# Altium PCB board.PcbDoc (part 1 of 2)
Units mm, origin at the board's own origin, x right, y up, seen from the top; angles counter-clockwise.
Board outline 36 x 187 mm, 2 copper layers (Top Layer, Bottom Layer), stack 1.66 mm thick; 133 components, 67 nets, 336 pads, 161 vias.
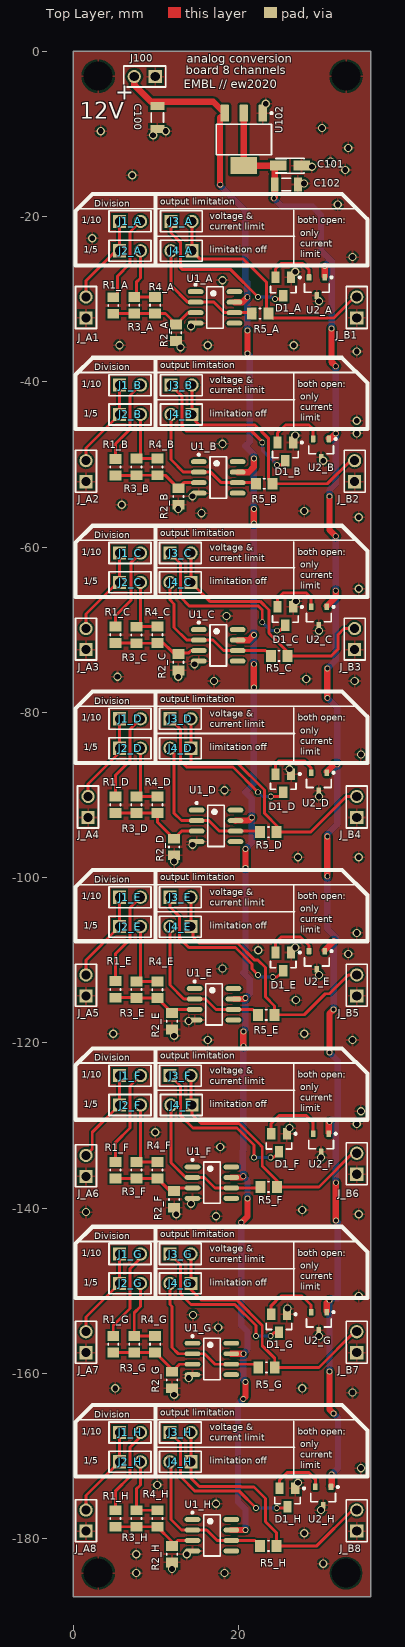
[diagram p0: Top Layer view]
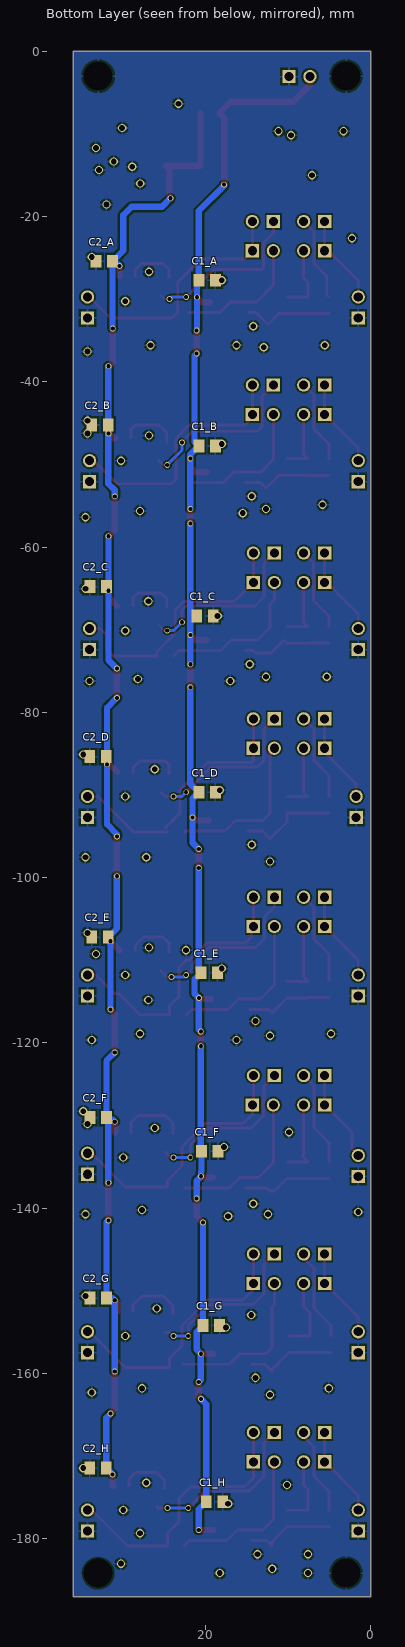
[diagram p1: Bottom Layer view, seen from below]
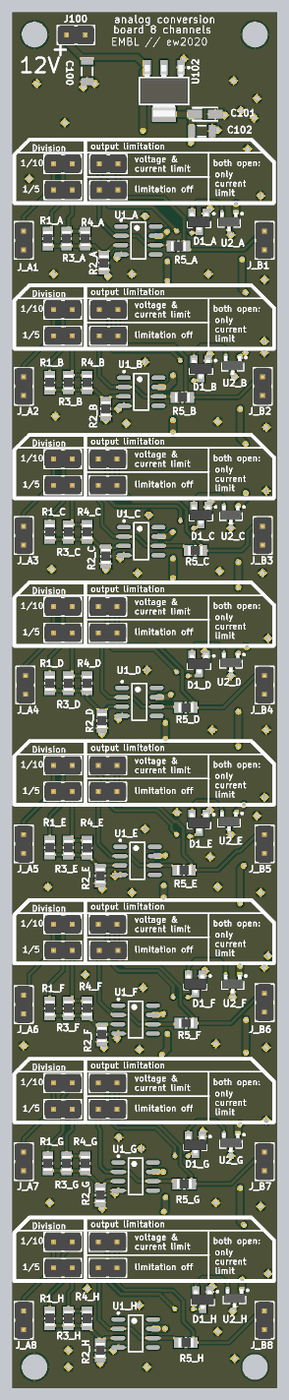
[diagram p2: 3D render of the assembled board from above, using the file's embedded part models]

## Layer stack, top to bottom
Top Solder: solder mask 0.0102, Solder Resist, Dk 3.5
Top Layer: signal copper 0.055
Dielectric1: dielectric 1.55, FR-4, Dk 4.8
Bottom Layer: signal copper 0.055
Bottom Solder: solder mask 0.0102, Solder Resist, Dk 3.5

## Board outline
0,-187 0,0 36,0 36,-187

## Design rules (kind name [scope] priority, off if disabled: settings)
Clearance clearance_polygons [InNamedPolygon('top_gnd_power')or InNamedPolygon('bottom_gnd_power') vs InNamedPolygon('top_gnd_uc')or InNamedPolygon('bottom_gnd_uc')] p1: gap=1.5 ignorepadtopadclearanceinfootprint=FALSE except(0: Arc-Hole Track-Hole SMDPad-Hole THPad-Hole Via-Hole Fill-Hole Poly-Hole Region-Hole Text-Hole)
Clearance ClearanceRoom [WithinRoom('less')  or WithinRoom('less1') or WithinRoom('less2') or WithinRoom('less3') or WithinRoom('less4')] p2: gap=0.203 ignorepadtopadclearanceinfootprint=FALSE except(0: Arc-Hole Track-Hole SMDPad-Hole THPad-Hole Via-Hole Fill-Hole Poly-Hole Region-Hole Text-Hole)
Clearance clearance_HP_class [InNetClass('high_power_net')] p3: gap=0.381 ignorepadtopadclearanceinfootprint=FALSE except(0: Arc-Hole Track-Hole SMDPad-Hole THPad-Hole Via-Hole Fill-Hole Poly-Hole Region-Hole Text-Hole)
Clearance "clearance_24V class" [InNetClass('24V_net')] p4: gap=0.254 ignorepadtopadclearanceinfootprint=FALSE except(0: Arc-Hole Track-Hole SMDPad-Hole THPad-Hole Via-Hole Fill-Hole Poly-Hole Region-Hole Text-Hole)
Clearance Clearance_1 [All] p5: gap=0.203 ignorepadtopadclearanceinfootprint=FALSE except(0: Arc-Hole Track-Hole SMDPad-Hole THPad-Hole Via-Hole Fill-Hole Poly-Hole Region-Hole Text-Hole)
FabricationTestPointUsage TestPointUsage [All] p1: valid=0 allowmultiple=FALSE
FabricationTestpoint Testpoint [All] p1: side=3 testpointundercomponent=TRUE minsize=1.016 maxsize=2.54 preferedsize=1.524 minholesize=0 maxholesize=1.016 preferedholesize=0.813 testpointgrid=0.025 allowsidetop=TRUE allowsidebottom=TRUE usegrid=TRUE gridtolerance=0
HoleSize [All] p1: absolutevalues=TRUE maxlimit=6 minlimit=0.025 maxpercent=80.000 minpercent=20.000
PolygonConnect PolygonConnect_Power [(InNet('+5V') OR InNet('-24VBUS'))] p1: connectstyle=Relief reliefconductorwidth=2.54 reliefentries=4 polygonreliefangle="90 Angle" airgapwidth=0.254
PolygonConnect [All] p2: connectstyle=Relief reliefconductorwidth=0.254 reliefentries=4 polygonreliefangle="90 Angle" airgapwidth=0.254
RoutingVias [All] p1: holewidth=0.5 width=0.7 viastyle="Through Hole" minholewidth=0.3 minwidth=0.5 maxholewidth=0.711 maxwidth=1.27
SilkToSolderMaskClearance SilkscreenOverComponentPads [IsPad] p1: minsilkscreentomaskgap=0.254 clearancetoexposedcopper=TRUE
SolderMaskExpansion [All] p1: expansion=0.102 istentingtop=FALSE
Width WidthRoom [WithinRoom('less')  or WithinRoom('less1') or WithinRoom('less2') or WithinRoom('less3') or WithinRoom('less4')] p1: maxlimit=0.356 minlimit=0.356 preferedwidth=0.356
Width Width_HC_class [InNetClass('High_Current_net')] p2: maxlimit=15.24 minlimit=1.524 preferedwidth=1.524
Width Width_HP_class [InNetClass('High_Power_net')] p3: maxlimit=1.016 minlimit=1.016 preferedwidth=1.016
Width "Width_24V class" [InNetClass('24V_net')] p4: maxlimit=0.762 minlimit=0.762 preferedwidth=0.762
Width Width_1 [All] p5: maxlimit=0.356 minlimit=0.356 preferedwidth=0.356
26 further rules are at their usual default settings.

## Classes and differential pairs
channel class Sheet1: A B C D
component class D: C1_D C2_D D1_D J1_D J2_D J3_D J4_D R1_D R2_D R3_D R4_D R5_D U1_D U2_D
component class C: C1_C C2_C D1_C J1_C J2_C J3_C J4_C R1_C R2_C R3_C R4_C R5_C U1_C U2_C
component class B: C1_B C2_B D1_B J1_B J2_B J3_B J4_B R1_B R2_B R3_B R4_B R5_B U1_B U2_B
component class A: C1_A C2_A D1_A J1_A J2_A J3_A J4_A R1_A R2_A R3_A R4_A R5_A U1_A U2 U2_A
net class 24V_net: +5V +12V
component class sheetPower: C100 C101 C102 J100 U102
component class sheet_top: J_A1 J_A2 J_A3 J_A4 J_A5 J_A6 J_A7 J_A8 J_B1 J_B2 J_B3 J_B4 J_B5 J_B6 J_B7 J_B8
component class E: C1_E C2_E D1_E J1_E J2_E J3_E J4_E R1_E R2_E R3_E R4_E R5_E U1_E U2_E
component class F: C1_F C2_F D1_F J1_F J2_F J3_F J4_F R1_F R2_F R3_F R4_F R5_F U1_F U2_F
component class G: C1_G C2_G D1_G J1_G J2_G J3_G J4_G R1_G R2_G R3_G R4_G R5_G U1_G U2_G
component class H: C1_H C2_H D1_H J1_H J2_H J3_H J4_H R1_H R2_H R3_H R4_H R5_H U1_H U2_H

## Components (designator, comment, footprint, x,y, rotation, side; value= is the part's Value field where it differs from the comment)
C1_A "100nF" CAPC2013X88X50ML20T25 19.812,-27.686 r0 bottom (schematic designator C1)
C1_B "100nF" CAPC2013X88X50ML20T25 19.812,-47.752 r0 bottom (schematic designator C1)
C1_C "100nF" CAPC2013X88X50ML20T25 20.066,-68.326 r0 bottom (schematic designator C1)
C1_D "100nF" CAPC2013X88X50ML20T25 19.812,-89.662 r0 bottom (schematic designator C1)
C1_E "100nF" CAPC2013X88X50ML20T25 19.558,-111.506 r0 bottom (schematic designator C1)
C1_F "100nF" CAPC2013X88X50ML20T25 19.495,-133.096 r0 bottom (schematic designator C1)
C1_G "100nF" CAPC2013X88X50ML20T25 19.304,-154.178 r0 bottom (schematic designator C1)
C1_H "100nF" CAPC2013X88X50ML20T25 18.923,-175.514 r0 bottom (schematic designator C1)
C2_A "100nF" CAPC2013X88X50ML20T25 32.258,-25.4 r0 bottom (schematic designator C2)
C2_B "100nF" CAPC2013X88X50ML20T25 32.766,-45.212 r0 bottom (schematic designator C2)
C2_C "100nF" CAPC2013X88X50ML20T25 33,-64.77 r0 bottom (schematic designator C2)
C2_D "100nF" CAPC2013X88X50ML20T25 33.02,-85.344 r0 bottom (schematic designator C2)
C2_E "100nF" CAPC2013X88X50ML20T25 32.766,-107.188 r0 bottom (schematic designator C2)
C2_F "100nF" CAPC2013X88X50ML20T25 33,-129.032 r0 bottom (schematic designator C2)
C2_G "100nF" CAPC2013X88X50ML20T25 33,-150.876 r0 bottom (schematic designator C2)
C2_H "100nF" CAPC2013X88X50ML20T25 33.02,-171.45 r0 bottom (schematic designator C2)
C100 "100uF" CAPC1206(3216)190_L 10.16,-8.004 r90 top
C101 "4,7 µF" "A Package" 24.809,-13.828 r0 top
C102 "100uF" CAPC1206(3216)190_L 25.77,-16.114 r180 top
D1_A "BAT54S" FAIR-SOT23-3_V 25.4,-28.448 r270 top (schematic designator D1)
D1_B "BAT54S" FAIR-SOT23-3_V 25.654,-48.43 r270 top (schematic designator D1)
D1_C "BAT54S" FAIR-SOT23-3_V 25.654,-68.326 r270 top (schematic designator D1)
D1_D "BAT54S" FAIR-SOT23-3_V 25.4,-88.562 r270 top (schematic designator D1)
D1_E "BAT54S" FAIR-SOT23-3_V 25.4,-110.152 r270 top (schematic designator D1)
D1_F "BAT54S" FAIR-SOT23-3_V 24.892,-132.08 r270 top (schematic designator D1)
D1_G "BAT54S" FAIR-SOT23-3_V 24.892,-153.924 r270 top (schematic designator D1)
D1_H "BAT54S" FAIR-SOT23-3_V 25.908,-175.006 r270 top (schematic designator D1)
J1_A "61300211121" 61300211121 5.588,-20.574 r0 top (schematic designator J1)
J1_B "61300211121" 61300211121 5.588,-40.386 r0 top (schematic designator J1)
J1_C "61300211121" 61300211121 5.588,-60.706 r0 top (schematic designator J1)
J1_D "61300211121" 61300211121 5.588,-80.772 r0 top (schematic designator J1)
J1_E "61300211121" 61300211121 5.588,-102.362 r0 top (schematic designator J1)
J1_F "61300211121" 61300211121 5.588,-123.952 r0 top (schematic designator J1)
J1_G "61300211121" 61300211121 5.588,-145.542 r0 top (schematic designator J1)
J1_H "61300211121" 61300211121 5.588,-167.132 r0 top (schematic designator J1)
J2_A "61300211121" 61300211121 5.588,-24.13 r0 top (schematic designator J2)
J2_B "61300211121" 61300211121 5.588,-43.942 r0 top (schematic designator J2)
J2_C "61300211121" 61300211121 5.588,-64.262 r0 top (schematic designator J2)
J2_D "61300211121" 61300211121 5.588,-84.328 r0 top (schematic designator J2)
J2_E "61300211121" 61300211121 5.588,-105.918 r0 top (schematic designator J2)
J2_F "61300211121" 61300211121 5.588,-127.508 r0 top (schematic designator J2)
J2_G "61300211121" 61300211121 5.588,-149.098 r0 top (schematic designator J2)
J2_H "61300211121" 61300211121 5.588,-170.691 r0 top (schematic designator J2)
J3_A "61300211121" 61300211121 11.805,-20.574 r0 top (schematic designator J3)
J3_B "61300211121" 61300211121 11.805,-40.386 r0 top (schematic designator J3)
J3_C "61300211121" 61300211121 11.684,-60.706 r0 top (schematic designator J3)
J3_D "61300211121" 61300211121 11.684,-80.772 r0 top (schematic designator J3)
J3_E "61300211121" 61300211121 11.684,-102.362 r0 top (schematic designator J3)
J3_F "61300211121" 61300211121 11.684,-123.952 r0 top (schematic designator J3)
J3_G "61300211121" 61300211121 11.684,-145.542 r0 top (schematic designator J3)
J3_H "61300211121" 61300211121 11.684,-167.132 r0 top (schematic designator J3)
J4_A "61300211121" 61300211121 14.345,-24.13 r180 top (schematic designator J4)
J4_B "61300211121" 61300211121 14.345,-43.942 r180 top (schematic designator J4)
J4_C "61300211121" 61300211121 14.224,-64.262 r180 top (schematic designator J4)
J4_D "61300211121" 61300211121 14.224,-84.328 r180 top (schematic designator J4)
J4_E "61300211121" 61300211121 14.224,-105.918 r180 top (schematic designator J4)
J4_F "61300211121" 61300211121 14.345,-127.508 r180 top (schematic designator J4)
J4_G "61300211121" 61300211121 14.224,-149.098 r180 top (schematic designator J4)
J4_H "61300211121" 61300211121 14.224,-170.691 r180 top (schematic designator J4)
J100 "61300211121" 61300211121 9.906,-3.048 r180 top
J_A1 "61300211121" 61300211121 1.524,-32.258 r90 top
J_A2 "61300211121" 61300211121 1.524,-52.07 r90 top
J_A3 "61300211121" 61300211121 1.524,-72.39 r90 top
J_A4 "61300211121" 61300211121 1.778,-92.71 r90 top
J_A5 "61300211121" 61300211121 1.524,-114.3 r90 top
J_A6 "61300211121" 61300211121 1.524,-136.144 r90 top
J_A7 "61300211121" 61300211121 1.524,-157.48 r90 top
J_A8 "61300211121" 61300211121 1.524,-179.07 r90 top
J_B1 "61300211121" 61300211121 34.29,-32.258 r90 top
J_B2 "61300211121" 61300211121 34.036,-52.07 r90 top
J_B3 "61300211121" 61300211121 34.036,-72.39 r90 top
J_B4 "61300211121" 61300211121 34.29,-92.71 r90 top
J_B5 "61300211121" 61300211121 34.29,-114.3 r90 top
J_B6 "61300211121" 61300211121 34.29,-135.89 r90 top
J_B7 "61300211121" 61300211121 34.29,-157.48 r90 top
J_B8 "61300211121" 61300211121 34.29,-179.07 r90 top
R1_A "9k (18k||18k)" YAGO-RC0805_M 4.826,-30.75 r90 top (schematic designator R1)
R1_B "9k (18k||18k)" YAGO-RC0805_M 5.08,-50.308 r90 top (schematic designator R1)
R1_C "9k (18k||18k)" YAGO-RC0805_M 5.08,-70.612 r90 top (schematic designator R1)
R1_D "9k (18k||18k)" YAGO-RC0805_M 5.08,-91.186 r90 top (schematic designator R1)
R1_E "9k (18k||18k)" YAGO-RC0805_M 5.08,-113.522 r90 top (schematic designator R1)
R1_F "9k (18k||18k)" YAGO-RC0805_M 5.08,-135.382 r90 top (schematic designator R1)
R1_G "9k (18k||18k)" YAGO-RC0805_M 4.826,-156.464 r90 top (schematic designator R1)
R1_H "9k (18k||18k)" YAGO-RC0805_M 5.08,-177.546 r90 top (schematic designator R1)
R2_A "1k" YAGO-RC0805_M 12.446,-34.036 r90 top (schematic designator R2)
R2_B "1k" YAGO-RC0805_M 12.7,-53.864 r90 top (schematic designator R2)
R2_C "1k" YAGO-RC0805_M 12.7,-73.914 r90 top (schematic designator R2)
R2_D "1k" YAGO-RC0805_M 12.192,-96.282 r90 top (schematic designator R2)
R2_E "1k" YAGO-RC0805_M 11.938,-117.364 r90 top (schematic designator R2)
R2_F "1k" YAGO-RC0805_M 12.192,-138.938 r90 top (schematic designator R2)
R2_G "1k" YAGO-RC0805_M 11.938,-160.782 r90 top (schematic designator R2)
R2_H "1k" YAGO-RC0805_M 11.938,-181.864 r90 top (schematic designator R2)
R3_A "4k7" YAGO-RC0805_M 7.366,-30.734 r90 top (schematic designator R3)
R3_B "4k7" YAGO-RC0805_M 7.62,-50.292 r90 top (schematic designator R3)
R3_C "4k7" YAGO-RC0805_M 7.62,-70.628 r90 top (schematic designator R3)
R3_D "4k7" YAGO-RC0805_M 7.62,-91.186 r90 top (schematic designator R3)
R3_E "4k7" YAGO-RC0805_M 7.62,-113.538 r90 top (schematic designator R3)
R3_F "4k7" YAGO-RC0805_M 7.62,-135.382 r90 top (schematic designator R3)
R3_G "4k7" YAGO-RC0805_M 7.366,-156.464 r90 top (schematic designator R3)
R3_H "4k7" YAGO-RC0805_M 7.62,-177.546 r90 top (schematic designator R3)
R4_A "27k" YAGO-RC0805_M 9.906,-30.734 r90 top (schematic designator R4)
R4_B "27k" YAGO-RC0805_M 10.16,-50.292 r90 top (schematic designator R4)
R4_C "27k" YAGO-RC0805_M 10.16,-70.612 r90 top (schematic designator R4)
R4_D "27k" YAGO-RC0805_M 10.16,-91.186 r90 top (schematic designator R4)
R4_E "27k" YAGO-RC0805_M 10.16,-113.554 r90 top (schematic designator R4)
R4_F "27k" YAGO-RC0805_M 10.16,-135.382 r90 top (schematic designator R4)
R4_G "27k" YAGO-RC0805_M 9.906,-156.464 r90 top (schematic designator R4)
R4_H "27k" YAGO-RC0805_M 10.16,-177.546 r90 top (schematic designator R4)
R5_A "220" YAGO-RC0805_M 22.59,-31.75 r180 top (schematic designator R5)
R5_B "220" YAGO-RC0805_M 23.114,-52.324 r180 top (schematic designator R5)
R5_C "220" YAGO-RC0805_M 24.892,-73.152 r180 top (schematic designator R5)
R5_D "220" YAGO-RC0805_M 23.606,-94.488 r180 top (schematic designator R5)
R5_E "220" YAGO-RC0805_M 23.352,-116.586 r180 top (schematic designator R5)
R5_F "220" YAGO-RC0805_M 23.622,-137.414 r180 top (schematic designator R5)
R5_G "220" YAGO-RC0805_M 23.368,-159.258 r180 top (schematic designator R5)
R5_H "220" YAGO-RC0805_M 23.606,-180.848 r180 top (schematic designator R5)
U1_A "AD8029ARZ" ADI-R-8_L 17.145,-30.988 r0 top (schematic designator U1)
U1_B "AD8029ARZ" ADI-R-8_L 17.526,-51.562 r0 top (schematic designator U1)
U1_C "AD8029ARZ" ADI-R-8_L 17.526,-71.882 r0 top (schematic designator U1)
U1_D "AD8029ARZ" ADI-R-8_L 17.272,-93.726 r0 top (schematic designator U1)
U1_E "AD8029ARZ" ADI-R-8_L 17.018,-115.316 r0 top (schematic designator U1)
U1_F "AD8029ARZ" ADI-R-8_L 16.764,-136.906 r0 top (schematic designator U1)
U1_G "AD8029ARZ" ADI-R-8_L 16.764,-158.242 r0 top (schematic designator U1)
U1_H "AD8029ARZ" ADI-R-8_L 16.764,-179.578 r0 top (schematic designator U1)
U2_A "REF3112AIDBZT" DBZ0003A_L 29.464,-28.448 r270 top (schematic designator U2)
U2_B "REF3112AIDBZT" DBZ0003A_L 29.972,-48.006 r270 top (schematic designator U2)
U2_C "REF3112AIDBZT" DBZ0003A_L 29.718,-68.326 r270 top (schematic designator U2)
U2_D "REF3112AIDBZT" DBZ0003A_L 29.718,-88.392 r270 top (schematic designator U2)
U2_E "REF3112AIDBZT" DBZ0003A_L 29.464,-109.982 r270 top (schematic designator U2)
U2_F "REF3112AIDBZT" DBZ0003A_L 29.972,-132.08 r270 top (schematic designator U2)
U2_G "REF3112AIDBZT" DBZ0003A_L 29.718,-153.67 r270 top (schematic designator U2)
U2_H "REF3112AIDBZT" DBZ0003A_L 30.226,-174.822 r270 top (schematic designator U2)
U102 "LM1117IMP-5.0/NOPB" DCY0004A_M 20.624,-10.653 r270 top

## Footprints (in the part's own frame and the unit in brackets; to place one, negate y for a bottom-side part, rotate by r counter-clockwise, add the part's x,y. Pads: shape width x height; smd on the part's side, far side on the other; paste and mask are expansions set on the pad)
61300211121 [mm] "2Pol; gerade; WR-PHD 2.54 mm THT Pin Header"
  rect 1.6x1.6 hole 1.1: 1(0,0)
  round 1.6 hole 1.1: 2(2.54,0)
  silkscreen extent -1.27,-1.27 3.81,1.27, body extent -1.27,-1.27 3.81,1.27, height 8.57
"A Package" [mm] "A Package; Low Density"
  rect 2x1.2 smd: 1(0,0) 2(2.8,0)
  silkscreen extent -0.3,-0.9 3.1,0.9
ADI-R-8_L [mm] "SOIC, 8-Leads, Body 4.9x3.9mm, Pitch 1.27mm, IPC High Density"
  oval 1.9x0.6 smd: 1(-2.35,1.905) 2(-2.35,0.635) 3(-2.35,-0.635) 4(-2.35,-1.905) 5(2.35,-1.905) 6(2.35,-0.635) 7(2.35,0.635) 8(2.35,1.905)
  silkscreen extent -2.47,-2.5 1,2.88, body extent -2,-2.5 2,2.5, height 1.75
CAPC1206(3216)190_L [mm] "Chip Capacitor, Body 3.2x1.6mm, Height 1.9mm, IPC High Density"
  rect 0.95x1.7 smd: 1(-1.4,0) 2(1.4,0)
  silkscreen extent -0.55,-0.75 0.55,0.75, body extent -1.7,-0.9 1.7,0.9, height 1.9
CAPC2013X88X50ML20T25 [mm] "Chip Capacitor, 2-Leads, Body 2.00x1.25mm, IPC Low Density"
  rect 1.3x1.55 smd: 1(-1,0) 2(1,0)
  body extent -1.1,-0.72 1.1,0.72, height 0.88
DBZ0003A_L [mm] "SOT23, 3-Leads, Body 3.04x1.4mm, Pitch 0.95mm, IPC High Density"
  rrect18% 0.8x0.55 smd: 1(-1.1,0.95) 2(-1.1,-0.95) 3(1.1,0)
  silkscreen extent -1.22,-1.5 0.7,1.9, body extent -1.26,-1.46 1.26,1.46, height 0.96
DCY0004A_M [mm] "SOT223, 4-Leads, Body 6.7x3.7mm, Pitch 2.3mm, IPC Low Density"
  rrect10% 2.05x1 smd: 1(-3.175,2.3) 2(-3.175,0) 3(-3.175,-2.3)
  rrect5% 2.05x3.25 smd: 4(3.175,0)
  silkscreen extent -3.3,-3.35 1.85,3.48, body extent -3.5,-3.25 3.5,3.25, height 1.62
FAIR-SOT23-3_V [mm] "SOT23, 3-Leads, Body 3.12x1.5mm, Pitch 0.95mm"
  rect 1.4x1 smd: 1(-1.1,0.95) 2(-1.1,-0.95) 3(1.1,0)
  silkscreen extent -1.22,-1.55 0.75,2.13, body extent -1.35,-1.56 1.35,1.56, height 1.2
YAGO-RC0805_M [mm] "Chip Resistor, 2-Leads, Body 2.00x1.25mm, IPC Low Density"
  rect 1.2x1.45 smd: 1(-1,0) 2(1,0)
  silkscreen extent -0.1,-0.63 0.1,0.63, body extent -1,-0.62 1,0.63, height 0.6

## Part data
C1_A C1_B C1_C C1_D C1_E C1_F C1_G C1_H C2_A C2_B C2_C C2_D C2_E C2_F C2_G C2_H: library part CMP-001-0082-2, "generic 0805 COG oder X7R Vielschichtkondensatoren max. +/-10%"
C100 C102: library part CMP-00469-2, "CAP 100uF 6.3V ±20% 1206 (3216 Metric) Thickness 1.9mm SMD", Case-EIA=1206, Case-Metric=3216, Manufacturer="WURTH ELEKTRONIK", Manufacturer Part Number=885012108005, Rated Voltage="6.3 V", Supplier Part Number=2495155, Tolerance=Â±20%, ComponentLink1Description=2326302.pdf, ComponentLink1URL=http://www.farnell.com/cad/2326302.pdf, ComponentLink2Description=1958456.pdf, ComponentLink2URL=http://www.farnell.com/datasheets/1958456.pdf, Max Thickness="1.9 mm", PartNumber=885012108005, Supplier=Farnell, Technology=SMT
C101: library part CMP-001-0039-3, "4,7 µF; 6V; Gr. A; T491A475K006AT", Capacitance=4.7µF, ESR (Equivalent Series Resistance)="6 Ohm", Lifetime @ Temp.="2000 Hrs @ 85°C", Manufacturer=KEMET, Manufacturer Size Code=A, Operating Temperature="-55°C ~ 125°C", Package / Case="1206 (3216 Metric)", PartNumber=T491A475K006AT, Supplier Part Number=399-9717-1-ND, Tolerance=±10%, Voltage - Rated=6.3V, ComponentLink1Description=KEM_T2005_T491.pdf, ComponentLink1URL=http://www.kemet.com/Lists/ProductCatalog/Attachments/254/KEM_T2005_T491.pdf, Failure Rate=-, Features="General Purpose", Height - Seated (Max)="0.071\" (1.80mm)", Lead Spacing=-, Mounting Type="Surface Mount", Packaging="Cut Tape (CT)", Part Status=Active, Size / Dimension="0.126\" L x 0.063\" W (3.20mm x 1.60mm)", Supplier=Digi-Key, Type=Molded
D1_A D1_B D1_C D1_D D1_E D1_F D1_G D1_H: library part CMP-00532-3, "Schottky Barrier Diode, 30 V, 0.2 A, -55 to 150 degC, 3-Pin SOT23, RoHS, Tape and Reel", Capacitance="1.8E-11 f", Frequency="16 MHz", Frequency Tolerance=30ppm, Load Capacitance="18 pF", Manufacturer="DIODES INC.", Max Operating Temperature=70degC, Min Operating Temperature=-10degC, Package Quantity=1000, Resistance="40 Ohm", ComponentLink1Description="Manufacturer URL", ComponentLink1URL=https://www.fairchildsemi.com/, ComponentLink2Description=Datasheet, ComponentLink2URL=https://www.fairchildsemi.com/datasheets/BA/BAT54S.pdf, ComponentLink3Description="Package Specification", ComponentLink3URL=http://www.fairchildsemi.com/dwg/MA/MA03D.pdf, DatasheetVersion="Rev. 2.3, 04/2016", ESR="40 Ohm", Height="0.9 mm", Length="5 mm", Mount="Surface Mount", PackageDescription="3-Pin Small Outline Transistor, Body 2.92 x 1.325 mm, Pitch 0.95 mm", PackageReference=SOT23-3, Packaging="Tape and Reel", PartNumber=BAT54S, Pins=4, REACH SVHC="No SVHC", RoHSCompliant=True, Tolerance=30ppm, Width="3.2 mm"
J1_A J1_B J1_C J1_D J1_E J1_F J1_G J1_H J2_A J2_B J2_C J2_D J2_E J2_F J2_G J2_H J3_A J3_B J3_C J3_D J3_E J3_F J3_G J3_H J4_A J4_B J4_C J4_D J4_E J4_F J4_G J4_H J100 J_A1 J_A2 J_A3 J_A4 J_A5 J_A6 J_A7 J_A8 J_B1 J_B2 J_B3 J_B4 J_B5 J_B6 J_B7 J_B8: library part CMP-001-0071-1, "2Pol; gerade; WR-PHD 2.54 mm THT Pin Header", Current Rating="3 A", Flammability Rating="UL 94 V-0", Insulation Resistance="1 GOhms", Manufacturer="Wurth Electronics", Supplier Part Number=710-61300211121, Voltage Rating="250 V", Accessory Type=-, Application="Wire to Board", Brand="Wurth Electronics", ComponentLink1Description=6130xx11121-538006.pdf, ComponentLink1URL=http://www.mouser.com/ds/2/445/6130xx11121-538006.pdf, Contact Gender="Pin (Male)", Contact Material="Copper Alloy", Contact Plating=Gold, Contact Type=-, Housing Gender=-, Housing Material="Polybutylene Terephthalate (PBT)", Latching Type=Unlatched, Manufacturer Part Number=61300211121, Mating Post Length="6 mm", Minimum Order Quantity=1, Mounting Angle=Straight, Mounting Style="Straight Pin", Number of Positions="2 Position", Number of Rows="1 Row", Packaging=Bulk, PartNumber=61300211121, Pitch="2.54 mm", Product=Headers, Reeling=False, RoHS - Mouser=Y, Row Spacing=-, Series=WR-PHD, Standard Pack Qty=1000, Supplier=Mouser, Termination Post Length="3 mm", Termination Style="Through Hole", Type="Pin Strip"
R1_A R1_B R1_C R1_D R1_E R1_F R1_G R1_H R2_A R2_B R2_C R2_D R2_E R2_F R2_G R2_H R3_A R3_B R3_C R3_D R3_E R3_F R3_G R3_H R4_A R4_B R4_C R4_D R4_E R4_F R4_G R4_H R5_A R5_B R5_C R5_D R5_E R5_F R5_G R5_H: library part CMP-001-0027-2, "0805 Yageo Standard BlackBox Resistors", Manufacturer=Yageo, Operating Temperature="-55°C ~ 155°C", Package / Case="0805 (2012 Metric)", Power (Watts)="0.125W, 1/8W", Supplier Device Package=0805, Temperature Coefficient=±200ppm/°C, Tolerance=±1%, ComponentLink1Description=PYu-RC_Group_51_RoHS_L_7.pdf, ComponentLink1URL=http://www.yageo.com/documents/recent/PYu-RC_Group_51_RoHS_L_7.pdf, Composition="Thick Film", Failure Rate=-, Features="Moisture Resistant", Height - Seated (Max)="0.024\" (0.60mm)", Packaging=Digi-Reel®, Part Status=Active, Size / Dimension="0.079\" L x 0.049\" W (2.00mm x 1.25mm)"
U1_A U1_B U1_C U1_D U1_E U1_F U1_G U1_H: library part CMP-00480-1, "Single Channel RRIO Operational Amplifier, 125 MHz BW, 62 V/us SR, Industrial, 8-pin SOIC (R-8), Tube", Amplifiers Per Package=1, Generic Part Number=AD8029, Input Bias Current=700nA, Input Offset Voltage=1.6mV, Manufacturer="Analog Devices", Code_JEDEC=MS-012-AA, ComponentLink1Description="Manufacturer URL", ComponentLink1URL=http://www.analog.com/en/index.html, ComponentLink2Description=Datasheet, ComponentLink2URL=http://www.analog.com/static/imported-files/data_sheets/AD8029_8030_8040.pdf, ComponentLink3Description="Package Specification", ComponentLink3URL=http://www.analog.com/static/imported-files/packages/PKG_PDF/SOIC_Narrow%20(R)/R_8.pdf, DatasheetVersion="Rev. B", Iq/Amp=1.5mA, Mounting Technology="Surface Mount", PackageDescription="8-Pin Standard Small Outline Package, Body 3.9 x 4.9 mm, Pitch 1.27 mm", PackageReference=R-8, PackageVersion=060506-A, PartNumber=AD8029ARZ, Slew Rate=62V/us, Small Signal Bandwidth=125MHz, V Span Max=12V, V Span Min=2.7V
U2_A U2_B U2_C U2_D U2_E U2_F U2_G U2_H: library part CMP-00534-1, "20 ppm / degC Max, 100 uA Series Voltage Reference, 3-pin SOT-23 (DBZ), Green (RoHS & no Sb/Br)", Manufacturer="Texas Instruments", Rating=Catalog, Temp Coeff(Max)(ppm/ degree C)=20, Temp Coeff(Typ)(ppm/ degree C)=10, Code_JEDEC=TO-236, ComponentLink1Description="Manufacturer URL", ComponentLink1URL=http://www.ti.com/, ComponentLink2Description=Datasheet, ComponentLink2URL=http://www.ti.com/general/docs/lit/getliterature.tsp?genericPartNumber=REF3112&fileType=pdf, ComponentLink3Description="Package Specification", ComponentLink3URL=http://www.ti.com/litv/pdf/mpds108a, DatasheetVersion=SBVS046C, Eco-Plan="Green (RoHS & no Sb/Br)", Initial Accuracy @ 25/deg C(%)=0.2, Iq(Max)(uA)=100, Mounting Technology="Surface Mount", PackageDescription="3-Pin Plastic Small Outline, Body 2.92 x 1.3 mm, Pitch 0.95 mm", PackageReference=DBZ0003A, PackageVersion=4203227/B, PartNumber=REF3112AIDBZT, SubFamily="Series Voltage Reference", VI(Max)(V)=5.5, VI(Min)(V)=1.8, VO(V)=1.25
U102: library part CMP-00485-1, "800mA Low-Dropout Linear Regulator, 4-pin SOT-223, Pb-Free", Manufacturer="Texas Instruments", PackageTopMarking=XYTT*N06B, PowerWise=N, Code_IPC=SOT223-4, Code_JEDEC=TO-261-AA, ComponentLink1Description="Datasheet URL", ComponentLink1URL=http://www.ti.com/general/docs/lit/getliterature.tsp?genericPartNumber=LM1117-N&fileType=pdf, CompType="LDO IC", High-Reliability=Y, PackageDescription="Molded SOT-223, 6.50 x 3.56 x 1.6mm Body, 4 Lead, 2.3mm Pitch", PackageReference=DCY0004A, PartNumber=LM1117IMP-5.0/NOPB, PinCount=4, RoHS=Y

## Free pads (board coordinates)
  round 3.302 hole 3.505 unplated: 0(3,-184.15) 0(3,-3) 0(33,-184.15) 0(33,-3)

## Via types
v1: diameter 1, hole 0.7, Top Layer to Bottom Layer, 99 vias
v2: diameter 0.7, hole 0.5, Top Layer to Bottom Layer, 62 vias

## Nets (pads, with @x,y where several pads share a name; then routed paths per layer and width w, separated by ;. In a path a pad name is that pad's centre, name@x,y a point inside that pad or via, vN(x,y) a via of type N, cw(c..) or ccw(c..) an arc to the next point about the centre after c; other vN are vias at no path point)
+5V: C2_A.1 C2_B.1 C2_C.1 C2_D.1 C2_E.1 C2_F.1 C2_G.1 C2_H.1 C101.1 C102.2 U2_A.1 U2_B.1 U2_C.1 U2_D.1 U2_E.1 U2_F.1 U2_G.1 U2_H.1 U102.2 U102.4 | length 192.6
  Top Layer w0.762: U102.2 U102.4 C101.1 24.37,-14.267 C102.2 24.37,-17.667 v2(24.257,-17.78) ; U2_E.1@30.414,-108.782 31.496,-107.7 v2(31.496,-107.696) ; U2_A.1@30.414,-27.248 v2(30.414,-25.974) ; U2_G.1@30.668,-152.47 30.668,-151.45 v2(30.988,-151.13) ; U2_D.1@30.668,-87.192 31.582,-86.278 v2(31.922,-86.278) ; U2_C.1@30.668,-67.126 31.75,-66.044 v2(31.75,-65.278) ; v2(30.734,-99.822) v2(30.734,-94.996) ; v2(30.734,-78.232) v2(30.734,-74.676) ; U2_F.1@30.922,-130.88 30.922,-129.606 v2(30.988,-129.54) ; U2_B.1@30.922,-46.806 31.172,-46.806 v2(31.75,-46.228) ; v2(30.988,-159.766) 30.988,-164.338 v2(31.496,-164.846) ; v2(30.988,-121.158) 30.988,-116.459 v2(31.496,-115.951) ; v2(30.988,-53.848) 30.988,-57.912 v2(31.75,-58.674) ; U2_H.1@31.176,-173.622 31.258,-173.54 v2(31.258,-172.212) ; v2(31.242,-33.528) 31.242,-37.592 v2(31.75,-38.1) ; v2(31.766,-141.478) v2(31.766,-136.922)
  Bottom Layer w0.762: v2(24.257,-17.78) 25.273,-18.796 28.956,-18.796 29.972,-19.812 29.972,-24.114 C2_A.1 ; v2(30.414,-25.974) 30.988,-25.4 C2_A.1 ; v2(30.734,-99.822) 30.734,-106.156 C2_E.1 ; v2(30.734,-94.996) 30.734,-94.742 31.922,-93.554 v2(31.922,-86.278) 31.922,-79.42 v2(30.734,-78.232) ; v2(30.734,-74.676) 31.75,-73.66 v2(31.75,-65.278) v2(31.75,-58.674) ; v2(30.988,-159.766) v2(30.988,-151.13) 31.242,-150.876 C2_G.1 32,-141.712 v2(31.766,-141.478) ; v2(30.988,-129.54) 31.262,-129.266 31.766,-129.266 v2(31.766,-136.922) ; v2(30.988,-121.158) 32,-122.17 C2_F.1 ; v2(30.988,-53.848) 30.988,-53.086 31.766,-52.308 C2_B.1 31.766,-38.116 v2(31.75,-38.1) ; v2(31.242,-33.528) 31.258,-33.512 C2_A.1 ; v2(31.258,-172.212) C2_H.1 32.02,-165.37 v2(31.496,-164.846) ; v2(31.496,-115.951) v2(31.496,-107.696)
+12V: C1_A.2 C1_B.2 C1_C.2 C1_D.2 C1_E.2 C1_F.2 C1_G.2 C1_H.2 C100.2 J100.2 U1_A.7 U1_B.7 U1_C.7 U1_D.7 U1_E.7 U1_F.7 U1_G.7 U1_H.7 U102.3 | length 206.6
  Top Layer w0.762: J100.2 7.366,-4.064 9.398,-6.096 16.942,-6.096 U102.3 17.755,-8.047 17.755,-16.104 v2(17.78,-16.129) ; U1_H.7 v2(20.828,-178.943) ; U1_G.7 v2(20.574,-157.607) ; U1_F.7 20.415,-136.271 v2(20.558,-136.128) ; U1_E.7 20.685,-114.681 v2(20.812,-114.554) ; U1_A.7 20.447,-30.353 v2(21.05,-29.75) ; U1_D.7 19.636,-93.077 21.223,-93.077 v2(21.59,-92.71) ; U1_C.7 21.209,-71.247 v2(21.844,-70.612) ; U1_B.7 21.209,-50.927 21.844,-50.292 v2(21.844,-49.276) ; v2(20.32,-141.732) 21.082,-140.97 v2(21.082,-138.811) ; v2(20.558,-163.068) 20.828,-162.798 v2(20.828,-161.036) ; v2(20.574,-120.396) v2(20.574,-118.618) ; v2(20.828,-98.806) v2(20.828,-96.52) ; v2(21.082,-36.576) v2(21.082,-33.782) ; v2(21.844,-76.962) v2(21.844,-74.168) ; v2(21.844,-57.15) v2(21.844,-55.372)
  Bottom Layer w0.762: v2@17.708,-16.2 20.812,-19.304 C1_A.2 21.05,-27.924 v2(21.05,-29.75) 21.05,-33.75 v2(21.082,-33.782) ; v2(20.32,-141.732) 20.32,-154.162 C1_G.2 21.082,-154.956 21.082,-157.099 v2(20.574,-157.607) 20.574,-160.782 v2(20.828,-161.036) ; v2(20.558,-163.068) 19.923,-163.703 C1_H.2 20.828,-176.419 v2(20.828,-178.943) ; v2(20.574,-120.396) 20.574,-133.017 C1_F.2 20.495,-135.557 20.558,-135.62 v2(20.558,-136.128) 21.082,-136.652 v2(21.082,-138.811) ; v2(20.574,-118.618) 20.812,-118.38 v2(20.812,-114.554) 21.336,-114.03 21.336,-112.284 C1_E.2 20.828,-111.236 v2(20.828,-98.806) ; v2(20.828,-96.52) 21.59,-95.758 v2(21.59,-92.71) 21.59,-90.44 C1_D.2 21.844,-88.63 v2(21.844,-76.962) ; v2(21.082,-36.576) 21.336,-36.83 21.336,-47.228 C1_B.2 21.844,-48.784 v2(21.844,-49.276) v2(21.844,-55.372) ; v2(21.844,-74.168) v2(21.844,-70.612) v2(21.844,-57.15)
GND: C1_A.1 C1_B.1 C1_C.1 C1_D.1 C1_E.1 C1_F.1 C1_G.1 C1_H.1 C2_A.2 C2_B.2 C2_C.2 C2_D.2 C2_E.2 C2_F.2 C2_G.2 C2_H.2 C100.1 C101.2 C102.1 D1_A.1 D1_B.1 D1_C.1 D1_D.1 D1_E.1 D1_F.1 D1_G.1 D1_H.1 J100.1 J_A1.1 J_A2.1 J_A3.1 J_A4.1 J_A5.1 J_A6.1 J_A7.1 J_A8.1 J_B1.1 J_B2.1 J_B3.1 J_B4.1 J_B5.1 J_B6.1 J_B7.1 J_B8.1 pad.0@3,-3 pad.0@3,-184.15 pad.0@33,-3 R2_A.1 R2_B.1 R2_C.1 R2_D.1 R2_E.1 R2_F.1 R2_G.1 R2_H.1 U1_A.4 U1_B.4 U1_C.4 U1_D.4 U1_E.4 U1_F.4 U1_G.4 U1_H.4 U2_A.3 U2_B.3 U2_C.3 U2_D.3 U2_E.3 U2_F.3 U2_G.3 U2_H.3 U102.1
  other v1: 7.62,-184.15 18.288,-184.15 11.938,-183.642 30.244,-183.007 7.62,-181.864 13.716,-181.864 27.94,-179.324 29.972,-176.53 17.272,-175.768 10.16,-173.482 27.178,-173.228 34.798,-171.45 12.192,-162.56 33.782,-162.306 5.08,-161.798 27.686,-161.798 13.97,-160.528 29.718,-155.464 17.526,-154.432 14.478,-152.908 25.908,-152.146 34.544,-150.622 17.272,-140.97 12.446,-140.716 34.544,-140.716 1.524,-140.462 27.686,-140.208 14.224,-139.446 29.972,-133.858 17.78,-132.588 9.906,-130.81 26.162,-130.302 34.29,-129.794 34.798,-128.27 16.256,-119.634 33.782,-119.634 12.192,-119.126 4.826,-118.872 27.94,-118.872 13.97,-117.348 26.924,-114.808 29.718,-111.76 18.034,-110.998 33.274,-109.22 22.368,-108.782 26.858,-108.458 34.29,-106.68 12.192,-98.044 27.178,-97.536 34.544,-97.536 14.414,-96.012 29.718,-90.17 18.288,-89.408 26.162,-86.868 34.798,-85.09 17.018,-76.2 34.036,-76.2 28.194,-75.946 5.334,-75.692 12.7,-75.692 14.668,-74.168 29.718,-70.104 18.542,-68.326 26.924,-66.548 34.544,-65.024 34.544,-56.388 15.494,-55.88 27.94,-55.626 12.7,-55.372 5.842,-54.864 14.414,-53.848 30.226,-49.53 18.034,-47.498 26.858,-46.482 34.29,-46.228 34.29,-44.704 34.29,-36.322 12.954,-35.814 5.588,-35.56 16.256,-35.56 26.67,-35.56 14.224,-33.274 29.718,-30.226 18.034,-27.686 26.858,-26.67 33.782,-24.892 2.286,-22.606 32.004,-18.542 27.899,-15.987 7.112,-14.986 32.893,-14.351 28.863,-13.955 31.115,-13.335 33.274,-11.684 9.652,-10.16 3.302,-9.652 11.176,-9.652 30.099,-9.271 23.291,-6.335
NetD1_A_2: D1_A.2 U2_A.2 | length 6.5
  Top Layer w0.356: D1_A.2 24.45,-26.35 25.146,-25.654 27.752,-25.654 28.514,-26.416 U2_A.2@28.514,-27.248
NetD1_A_3: D1_A.3 J3_A.1 | length 20.4
  Top Layer w0.356: J3_A.1@11.938,-20.574 J3_A.1 11.805,-21.965 12.986,-23.146 12.986,-26.194 13.208,-26.416 19.05,-26.416 v2(22.352,-29.718) ; v2(24.384,-29.972) 24.976,-29.972 D1_A.3
  Bottom Layer w0.356: v2(22.352,-29.718) 24.13,-29.718 v2(24.384,-29.972)
NetD1_B_2: D1_B.2 U2_B.2 | length 7.2
  Top Layer w0.356: D1_B.2 24.704,-46.162 25.654,-45.212 28.514,-45.212 29.022,-45.72 U2_B.2@29.022,-46.806
NetD1_B_3: D1_B.3 J3_B.1 | length 20.8
  Top Layer w0.356: J3_B.1 13.164,-41.745 13.164,-45.422 13.716,-45.974 21.59,-45.974 22.86,-47.244 v2(22.86,-47.33) ; v2(24.638,-50.038) 25.146,-50.038 D1_B.3
  Bottom Layer w0.356: v2(22.86,-47.33) 22.86,-48.26 v2(24.638,-50.038)
NetD1_C_2: D1_C.2 U2_C.2 | length 6.6
  Top Layer w0.356: D1_C.2 24.704,-66.228 25.4,-65.532 28.194,-65.532 28.768,-66.106 U2_C.2@28.768,-67.126
NetD1_C_3: D1_C.3 J3_C.1 | length 21.4
  Top Layer w0.356: J3_C.1 12.954,-61.976 12.954,-66.04 14.021,-67.107 22.375,-67.107 22.86,-67.592 v2(22.86,-69.088) ; v2(24.638,-70.104) 24.976,-70.104 D1_C.3
  Bottom Layer w0.356: v2(22.86,-69.088) 23.876,-70.104 v2(24.638,-70.104)
NetD1_D_2: D1_D.2 U2_D.2 | length 6.5
  Top Layer w0.356: D1_D.2 24.45,-86.294 24.892,-85.852 27.94,-85.852 28.768,-86.68 U2_D.2@28.768,-87.192
NetD1_D_3: D1_D.3 J3_D.1 | length 20.1
  Top Layer w0.356: J3_D.1 12.954,-82.042 12.954,-85.852 13.716,-86.614 19.304,-86.614 v2(22.352,-89.662) ; v2(23.892,-90.186) 24.876,-90.186 D1_D.3
  Bottom Layer w0.356: v2(22.352,-89.662) 22.876,-90.186 v2(23.892,-90.186)
NetD1_E_2: D1_E.2 U2_E.2 | length 6.5
  Top Layer w0.356: D1_E.2 24.45,-107.884 25.146,-107.188 27.498,-107.188 28.514,-108.204 U2_E.2@28.514,-108.782
NetD1_E_3: D1_E.3 J3_E.1 | length 20.7
  Top Layer w0.356: J3_E.1 11.684,-103.556 12.865,-104.737 12.865,-107.353 13.97,-108.458 19.622,-108.458 21.59,-110.426 21.59,-110.998 v2(22.352,-111.76) ; v2(24.13,-112.014) 24.638,-112.014 D1_E.3
  Bottom Layer w0.356: v2(22.352,-111.76) 22.352,-112.014 v2(24.13,-112.014)
NetD1_F_2: D1_F.2 U2_F.2 | length 8.3
  Top Layer w0.356: D1_F.2 23.942,-129.728 24.892,-128.778 28.194,-128.778 29.022,-129.606 U2_F.2@29.022,-130.88
NetD1_F_3: D1_F.3 J3_F.1 | length 20.6
  Top Layer w0.356: J3_F.1 12.954,-125.222 12.954,-126.955 12.986,-126.987 12.986,-128.81 14.478,-130.302 19.812,-130.302 21.844,-132.334 v2(21.844,-133.858) ; v2(23.876,-133.858) 24.214,-133.858 D1_F.3
  Bottom Layer w0.356: v2(21.844,-133.858) v2(23.876,-133.858)
NetD1_G_2: D1_G.2 U2_G.2 | length 7.5
  Top Layer w0.356: D1_G.2 23.942,-151.794 25.114,-150.622 27.67,-150.622 28.768,-151.72 U2_G.2@28.768,-152.47
NetD1_G_3: D1_G.3 J3_G.1 | length 20.3
  Top Layer w0.356: J3_G.1 12.954,-146.812 12.954,-150.368 14.224,-151.638 19.53,-151.638 22.098,-154.206 v2(22.098,-155.448) ; v2(23.876,-155.464) 24.316,-155.024 D1_G.3
  Bottom Layer w0.356: v2(22.098,-155.448) 23.86,-155.448 v2(23.876,-155.464)
NetD1_H_2: D1_H.2 U2_H.2 | length 6.9
  Top Layer w0.356: D1_H.2 24.958,-172.908 25.908,-171.958 28.448,-171.958 29.276,-172.786 U2_H.2@29.276,-173.622
NetD1_H_3: D1_H.3 J3_H.1 | length 20.5
  Top Layer w0.356: J3_H.1 12.954,-168.402 12.954,-172.466 14.732,-174.244 20.066,-174.244 v2(22.098,-176.276) ; v2(24.606,-176.276) 25.738,-176.276 D1_H.3
  Bottom Layer w0.356: v2(22.098,-176.276) v2(24.606,-176.276)
NetJ1_A_1: J1_A.1 J2_A.1 J_A1.2 | length 11.1
  Top Layer w0.356: J_A1.2 1.524,-27.752 5.146,-24.13 J2_A.1 J1_A.1
NetJ1_A_2: J1_A.2 R1_A.2 | length 10.4
  Top Layer w0.356: R1_A.2@5.08,-29.734 5.334,-29.48 5.334,-27.206 6.858,-25.682 6.858,-21.844 J1_A.2
NetJ1_B_1: J1_B.1 J2_B.1 J_A2.2 | length 10.8
  Top Layer w0.356: J_A2.2 1.524,-48.006 J2_B.1 J1_B.1
NetJ1_B_2: J1_B.2 R1_B.2 | length 10.2
  Top Layer w0.356: R1_B.2 5.08,-47.498 6.858,-45.72 6.858,-41.656 J1_B.2
NetJ1_C_1: J1_C.1 J2_C.1 J_A3.2 | length 11
  Top Layer w0.356: J_A3.2 1.524,-68.072 5.334,-64.262 J2_C.1 J1_C.1
NetJ1_C_2: J1_C.2 R1_C.2 | length 10.2
  Top Layer w0.356: R1_C.2 5.08,-68.326 6.947,-66.459 6.947,-61.887 J1_C.2
NetJ1_D_1: J1_D.1 J2_D.1 J_A4.2 | length 11
  Top Layer w0.356: J_A4.2 1.778,-88.646 5.588,-84.836 J2_D.1 J1_D.1
NetJ1_D_2: J1_D.2 R1_D.2 | length 10.7
  Top Layer w0.356: R1_D.2 5.08,-87.63 6.858,-85.852 6.858,-82.042 J1_D.2
NetJ1_E_1: J1_E.1 J2_E.1 J_A5.2 | length 11.1
  Top Layer w0.356: J_A5.2 1.524,-109.982 J2_E.1 J1_E.1
NetJ1_E_2: J1_E.2 R1_E.2 | length 11.4
  Top Layer w0.356: R1_E.2 5.08,-109.22 6.858,-107.442 6.858,-103.632 J1_E.2
NetJ1_F_1: J1_F.1 J2_F.1 J_A6.2 | length 11.3
  Top Layer w0.356: J_A6.2 2.286,-132.842 2.286,-130.81 J2_F.1 J1_F.1
NetJ1_F_2: J1_F.2 R1_F.2 | length 11.7
  Top Layer w0.356: R1_F.2 5.08,-132.08 6.858,-130.302 6.858,-125.222 J1_F.2
NetJ1_G_1: J1_G.1 J2_G.1 J_A7.2 | length 11.1
  Top Layer w0.356: J_A7.2 1.524,-153.162 J2_G.1 J1_G.1
NetJ1_G_2: J1_G.2 R1_G.2 | length 11.3
  Top Layer w0.356: R1_G.2 4.826,-154.178 6.858,-152.146 6.858,-147.32 8.128,-146.05 J1_G.2
NetJ1_H_1: J1_H.1 J2_H.1 J_A8.2 | length 11.1
  Top Layer w0.356: J_A8.2 1.524,-174.755 J2_H.1 J1_H.1
NetJ1_H_2: J1_H.2 R1_H.2 | length 10.7
  Top Layer w0.356: R1_H.2 5.08,-174.244 6.858,-172.466 6.858,-168.91 8.128,-167.64 J1_H.2
NetJ2_A_2: J2_A.2 R3_A.2 R4_A.2 | length 8.4
  Top Layer w0.356: J2_A.2 8.128,-27.432 7.62,-27.94 7.62,-29.734 R4_A.2 R4_A.2@10.16,-29.734
NetJ2_B_2: J2_B.2 R3_B.2 R4_B.2 | length 8.1
  Top Layer w0.356: J2_B.2 8.128,-48.784 R3_B.2 R4_B.2
NetJ2_C_2: J2_C.2 R3_C.2 R4_C.2 | length 8.1
  Top Layer w0.356: R3_C.2 R3_C.2@7.636,-69.612 ; J2_C.2 8.128,-69.12 R3_C.2@7.636,-69.612 ; R4_C.2 R3_C.2@7.636,-69.612
NetJ2_D_2: J2_D.2 R3_D.2 R4_D.2 | length 8.6
  Top Layer w0.356: J2_D.2 8.128,-89.678 R3_D.2 R4_D.2
NetJ2_E_2: J2_E.2 R3_E.2 R4_E.2 | length 9.4
  Top Layer w0.356: J2_E.2 8.128,-112.03 R3_E.2 10.144,-112.538 R4_E.2
NetJ2_F_2: J2_F.2 R3_F.2 R4_F.2 | length 9.6
  Top Layer w0.356: J2_F.2 8.128,-133.874 R3_F.2 R4_F.2
NetJ2_G_2: J2_G.2 R3_G.2 R4_G.2 | length 9.2
  Top Layer w0.356: J2_G.2 8.128,-151.892 7.366,-152.654 R3_G.2 R4_G.2
NetJ2_H_2: J2_H.2 R3_H.2 R4_H.2 | length 8.6
  Top Layer w0.356: J2_H.2 8.128,-173.482 7.62,-173.99 R3_H.2 R4_H.2
NetJ3_A_2: J3_A.2 J4_A.1 J_B1.2 R5_A.1 | length 30
  Top Layer w0.356: J3_A.2 J4_A.1 15.361,-25.146 20.574,-25.146 23.368,-27.94 23.368,-31.528 R5_A.1 24.098,-32.258 31.496,-32.258 34.036,-29.718 J_B1.2
NetJ3_B_2: J3_B.2 J4_B.1 J_B2.2 R5_B.1 | length 31
  Top Layer w0.356: J3_B.2 J4_B.1 14.345,-44.317 15.24,-45.212 21.996,-45.212 23.591,-46.807 23.591,-47.633 23.59,-47.634 23.59,-51.8 R5_B.1 30.734,-52.324 33.528,-49.53 J_B2.2
NetJ3_C_2: J3_C.2 J4_C.1 J_B3.2 R5_C.1 | length 31.4
  Top Layer w0.356: J3_C.2 J4_C.1 16.51,-66.548 22.606,-66.548 23.673,-67.615 23.673,-70.409 25.892,-72.628 R5_C.1 31.242,-73.152 32.004,-72.39 32.004,-70.612 32.766,-69.85 J_B3.2
NetJ3_D_2: J3_D.2 J4_D.1 J_B4.2 R5_D.1 | length 32.2
  Top Layer w0.356: J3_D.2 J4_D.1 14.224,-85.852 14.427,-86.055 19.779,-86.055 23.114,-89.39 23.114,-92.202 R5_D.1@24.892,-93.98 ; R5_D.1 28.702,-94.488 33.02,-90.17 J_B4.2
NetJ3_E_2: J3_E.2 J4_E.1 J_B5.2 R5_E.1 | length 33.3
  Top Layer w0.356: J3_E.2 J4_E.1 14.478,-106.172 14.478,-107.188 15.189,-107.899 19.853,-107.899 21.936,-109.982 22.352,-109.982 23.244,-110.874 23.244,-114.414 24.352,-115.522 R5_E.1 27.94,-116.586 30.48,-114.046 30.988,-114.046 33.274,-111.76 J_B5.2
NetJ3_F_2: J3_F.2 J4_F.1 J_B6.2 R5_F.1 | length 31.8
  Top Layer w0.356: J3_F.2 14.224,-127.387 J4_F.1 14.345,-128.645 15.443,-129.743 20.043,-129.743 22.403,-132.103 22.403,-132.115 22.86,-132.572 22.86,-134.89 24.622,-136.652 R5_F.1 29.718,-137.414 33.782,-133.35 J_B6.2
NetJ3_G_2: J3_G.2 J4_G.1 J_B7.2 R5_G.1 | length 32.2
  Top Layer w0.356: J3_G.2 J4_G.1 14.224,-149.86 15.443,-151.079 19.761,-151.079 22.86,-154.178 22.86,-156.652 24.368,-158.16 R5_G.1 29.718,-159.258 34.036,-154.94 J_B7.2
NetJ3_H_2: J3_H.2 J4_H.1 J_B8.2 R5_H.1 | length 33.3
  Top Layer w0.356: J3_H.2 J4_H.1 14.224,-172.67 15.239,-173.685 20.297,-173.685 20.348,-173.736 21.844,-173.736 23.244,-175.136 23.244,-177.93 24.606,-179.292 R5_H.1 29.464,-180.848 33.782,-176.53 J_B8.2
NetJ4_A_2: J4_A.2 R5_A.2 U1_A.2 U1_A.6 | length 15.7
  Top Layer w0.356: J4_A.2 11.805,-28.315 13.843,-30.353 U1_A.2 17.018,-30.353 18.288,-31.623 U1_A.6 R5_A.2@21.987,-31.623
NetJ4_B_2: J4_B.2 R5_B.2 U1_B.2 U1_B.6 | length 17
  Top Layer w0.356: J4_B.2 11.805,-49.397 13.335,-50.927 U1_B.2 16.637,-50.927 17.907,-52.197 U1_B.6 21.987,-52.197 R5_B.2
NetJ4_C_2: J4_C.2 R5_C.2 U1_C.2 U1_C.6 | length 18.8
  Top Layer w0.356: J4_C.2 11.684,-66.364 12.192,-66.872 12.192,-69.723 13.716,-71.247 U1_C.2 16.891,-71.247 18.161,-72.517 U1_C.6 23.257,-72.517 R5_C.2
NetJ4_D_2: J4_D.2 R5_D.2 U1_D.2 U1_D.6 | length 19.4
  Top Layer w0.356: J4_D.2 12.192,-84.836 12.192,-92.202 13.081,-93.091 U1_D.2 16.383,-93.091 17.653,-94.361 U1_D.6 22.479,-94.361 R5_D.2
NetJ4_E_2: J4_E.2 R5_E.2 U1_E.2 U1_E.6 | length 19.2
  Top Layer w0.356: J4_E.2 11.684,-112.998 13.367,-114.681 U1_E.2 16.002,-114.681 17.272,-115.951 U1_E.6 21.717,-115.951 R5_E.2
NetJ4_F_2: J4_F.2 R5_F.2 U1_F.2 U1_F.6 | length 19.1
  Top Layer w0.356: J4_F.2 11.805,-134.487 13.589,-136.271 U1_F.2 15.875,-136.271 17.145,-137.541 U1_F.6 22.495,-137.541 R5_F.2
NetJ4_G_2: J4_G.2 R5_G.2 U1_G.2 U1_G.6 | length 19.5
  Top Layer w0.356: J4_G.2 11.684,-151.638 11.938,-151.892 11.938,-156.845 12.7,-157.607 U1_G.2 15.875,-157.607 17.145,-158.877 U1_G.6 R5_G.2@22.749,-158.877
NetJ4_H_2: J4_H.2 R5_H.2 U1_H.2 U1_H.6 | length 19.1
  Top Layer w0.356: J4_H.2 11.805,-170.812 11.805,-177.667 13.081,-178.943 U1_H.2 16.129,-178.943 17.399,-180.213 U1_H.6 21.971,-180.213 R5_H.2
NetR1_A_1: R1_A.1 R2_A.2 R3_A.1 R4_A.1 U1_A.3 | length 10.8
  Top Layer w0.356: R1_A.1@5.08,-31.734 R3_A.1 R4_A.1 11.144,-31.734 R2_A.2 13.859,-31.623 U1_A.3
NetR1_B_1: R1_B.1 R2_B.2 R3_B.1 R4_B.1 U1_B.3 | length 11
  Top Layer w0.356: R1_B.1 7.604,-51.308 R3_B.1 R4_B.1 11.128,-51.292 R2_B.2 13.367,-52.197 U1_B.3
NetR1_C_1: R1_C.1 R2_C.2 R3_C.1 R4_C.1 U1_C.3 | length 10.9
  Top Layer w0.356: R1_C.1 7.604,-71.612 R3_C.1 10.144,-71.628 R4_C.1 10.398,-71.374 10.668,-71.374 12.081,-72.787 13.97,-72.787 14.24,-72.517 U1_C.3
NetR1_D_1: R1_D.1 R2_D.2 R3_D.1 R4_D.1 U1_D.3 | length 12.1
  Top Layer w0.356: R1_D.1 R3_D.1 R4_D.1 10.16,-93.25 R2_D.2 13.113,-94.361 U1_D.3
NetR1_E_1: R1_E.1 R2_E.2 R3_E.1 R4_E.1 U1_E.3 | length 10.5
  Top Layer w0.356: R1_E.1 7.604,-114.522 R3_E.1 10.144,-114.538 R4_E.1 11.938,-116.332 R2_E.2 12.351,-115.951 U1_E.3
NetR1_F_1: R1_F.1 R2_F.2 R3_F.1 R4_F.1 U1_F.3 | length 10.9
  Top Layer w0.356: R1_F.1 R3_F.1 R4_F.1 11.716,-137.938 R2_F.2 12.589,-137.541 U1_F.3 U1_F.3@15.176,-137.541
NetR1_G_1: R1_G.1 R2_G.2 R3_G.1 R4_G.1 U1_G.3 | length 11.1
  Top Layer w0.356: R1_G.1 R3_G.1 R4_G.1 11.938,-159.496 R2_G.2 12.843,-158.877 U1_G.3
NetR1_H_1: R1_H.1 R2_H.2 R3_H.1 R4_H.1 U1_H.3 | length 10.9
  Top Layer w0.356: R1_H.1 R3_H.1 R4_H.1 11.938,-180.324 R2_H.2 12.589,-180.213 U1_H.3
pads on no net: U1_A.1 U1_A.5 U1_A.8 U1_B.1 U1_B.5 U1_B.8 U1_C.1 U1_C.5 U1_C.8 U1_D.1 U1_D.5 U1_D.8 U1_E.1 U1_E.5 U1_E.8 U1_F.1 U1_F.5 U1_F.8 U1_G.1 U1_G.5 U1_G.8 U1_H.1 U1_H.5 U1_H.8

## Polygon pours and split planes (outlines as drawn)
GND on Bottom Layer "bot gnd" (solid, remove dead copper, pour order 1): 0,-187 36,-187 36,0 0,0
GND on Top Layer "TOP GND" (solid, remove dead copper, pour order 0): 0,-187 36,-187 36,0 0,0

## Silkscreen, mask and mechanical layers (free items; w line width, h text height)
Top Overlay:
  lines w0.2: 0.508,-165.608 34.036,-165.608 ; 0.508,-144.018 34.036,-144.018 ; 0.508,-122.428 34.036,-122.428 ; 0.508,-100.838 34.036,-100.838 ; 0.508,-79.248 34.036,-79.248 ; 0.508,-59.182 34.036,-59.182 ; 0.508,-38.862 34.036,-38.862 ; 0.508,-19.05 34.036,-19.05 ; 10.16,-168.91 26.754,-168.91 ; 10.16,-147.32 26.754,-147.32 ; 10.16,-125.73 26.754,-125.73 ; 10.16,-104.14 26.754,-104.14 ; 10.16,-82.55 26.754,-82.55 ; 10.16,-62.484 26.754,-62.484 ; 10.16,-42.164 26.754,-42.164 ; 10.16,-22.352 26.754,-22.352 ; 26.67,-172.466 26.67,-165.778 ; 26.67,-150.876 26.67,-144.188 ; 26.67,-129.286 26.67,-122.598 ; 26.67,-107.696 26.67,-101.008 ; 26.67,-86.106 26.67,-79.418 ; 26.67,-66.04 26.67,-59.352 ; 26.67,-45.72 26.67,-39.032 ; 26.67,-25.908 26.67,-19.22
  lines w0.5: 9.923,-172.466 9.923,-163.83 ; 9.923,-150.876 9.923,-142.24 ; 9.923,-129.286 9.923,-120.65 ; 9.923,-107.696 9.923,-99.06 ; 9.923,-86.106 9.923,-77.47 ; 9.923,-66.04 9.923,-57.404 ; 9.923,-45.72 9.923,-37.084 ; 9.923,-25.908 9.923,-17.272 ; 35.56,-172.466 0.254,-172.466 0.254,-165.878 2.302,-163.83 32.512,-163.83 35.577,-166.895 ; 35.56,-150.876 0.254,-150.876 0.254,-144.288 2.302,-142.24 32.512,-142.24 35.577,-145.305 ; 35.56,-129.286 0.254,-129.286 0.254,-122.698 2.302,-120.65 32.512,-120.65 35.577,-123.715 ; 35.56,-107.696 0.254,-107.696 0.254,-101.108 2.302,-99.06 32.512,-99.06 35.577,-102.125 ; 35.56,-86.106 0.254,-86.106 0.254,-79.518 2.302,-77.47 32.512,-77.47 35.577,-80.535 ; 35.56,-66.04 0.254,-66.04 0.254,-59.452 2.302,-57.404 32.512,-57.404 35.577,-60.469 ; 35.56,-45.72 0.254,-45.72 0.254,-39.132 2.302,-37.084 32.512,-37.084 35.577,-40.149 ; 35.56,-25.908 0.254,-25.908 0.254,-19.32 2.302,-17.272 32.512,-17.272 35.577,-20.337 ; 35.577,-172.466 35.577,-166.878 ; 35.577,-150.876 35.577,-145.288 ; 35.577,-129.286 35.577,-123.698 ; 35.577,-107.696 35.577,-102.108 ; 35.577,-86.106 35.577,-80.518 ; 35.577,-66.04 35.577,-60.452 ; 35.577,-45.72 35.577,-40.132 ; 35.577,-25.908 35.577,-20.32
  text "analog conversion" at 13.716,-1.397 h1
  text "board 8 channels" at 13.589,-2.794 h1
  text "EMBL // ew2020" at 13.335,-4.445 h1
  text "+" at 5.08,-5.842 h2
  text "12V" at 0.762,-8.128 h2
  text "output limitation" at 10.527,-18.542 h0.8
  text "Division" at 2.54,-18.796 h0.8
  text "voltage &" at 16.51,-20.32 h0.8
  text "1/10" at 1.016,-20.828 h0.8
  text "both open:" at 27.178,-20.828 h0.8
  text "current limit" at 16.51,-21.59 h0.8
  text "only" at 27.432,-22.352 h0.8
  text "current" at 27.432,-23.622 h0.8
  text "1/5" at 1.27,-24.384 h0.8
  text "limitation off" at 16.51,-24.384 h0.8
  text "limit" at 27.432,-24.892 h0.8
  text "output limitation" at 10.527,-38.354 h0.8
  text "Division" at 2.54,-38.608 h0.8
  text "voltage &" at 16.51,-40.132 h0.8
  text "1/10" at 1.016,-40.64 h0.8
  text "both open:" at 27.178,-40.64 h0.8
  text "current limit" at 16.51,-41.402 h0.8
  text "only" at 27.432,-42.164 h0.8
  text "current" at 27.432,-43.434 h0.8
  text "1/5" at 1.27,-44.196 h0.8
  text "limitation off" at 16.51,-44.196 h0.8
  text "limit" at 27.432,-44.704 h0.8
  text "output limitation" at 10.527,-58.674 h0.8
  text "Division" at 2.54,-58.928 h0.8
  text "voltage &" at 16.51,-60.452 h0.8
  text "1/10" at 1.016,-60.96 h0.8
  text "both open:" at 27.178,-60.96 h0.8
  text "current limit" at 16.51,-61.722 h0.8
  text "only" at 27.432,-62.484 h0.8
  text "current" at 27.432,-63.754 h0.8
  text "1/5" at 1.27,-64.516 h0.8
  text "limitation off" at 16.51,-64.516 h0.8
  text "limit" at 27.432,-65.024 h0.8
  text "output limitation" at 10.527,-78.74 h0.8
  text "Division" at 2.54,-78.994 h0.8
  text "voltage &" at 16.51,-80.518 h0.8
  text "1/10" at 1.016,-81.026 h0.8
  text "both open:" at 27.178,-81.026 h0.8
  text "current limit" at 16.51,-81.788 h0.8
  text "only" at 27.432,-82.55 h0.8
  text "current" at 27.432,-83.82 h0.8
  text "1/5" at 1.27,-84.582 h0.8
  text "limitation off" at 16.51,-84.582 h0.8
  text "limit" at 27.432,-85.09 h0.8
  text "output limitation" at 10.527,-100.33 h0.8
  text "Division" at 2.54,-100.584 h0.8
  text "voltage &" at 16.51,-102.108 h0.8
  text "1/10" at 1.016,-102.616 h0.8
  text "both open:" at 27.178,-102.616 h0.8
  text "current limit" at 16.51,-103.378 h0.8
  text "only" at 27.432,-104.14 h0.8
  text "current" at 27.432,-105.41 h0.8
  text "1/5" at 1.27,-106.172 h0.8
  text "limitation off" at 16.51,-106.172 h0.8
  text "limit" at 27.432,-106.68 h0.8
  text "output limitation" at 10.527,-121.92 h0.8
  text "Division" at 2.54,-122.174 h0.8
  text "voltage &" at 16.51,-123.698 h0.8
  text "1/10" at 1.016,-124.206 h0.8
  text "both open:" at 27.178,-124.206 h0.8
  text "current limit" at 16.51,-124.968 h0.8
  text "only" at 27.432,-125.73 h0.8
  text "current" at 27.432,-127 h0.8
  text "1/5" at 1.27,-127.762 h0.8
  text "limitation off" at 16.51,-127.762 h0.8
  text "limit" at 27.432,-128.27 h0.8
  text "output limitation" at 10.527,-143.51 h0.8
  text "Division" at 2.54,-143.764 h0.8
  text "voltage &" at 16.51,-145.288 h0.8
  text "1/10" at 1.016,-145.796 h0.8
  text "both open:" at 27.178,-145.796 h0.8
  text "current limit" at 16.51,-146.558 h0.8
  text "only" at 27.432,-147.32 h0.8
  text "current" at 27.432,-148.59 h0.8
  text "1/5" at 1.27,-149.352 h0.8
  text "limitation off" at 16.51,-149.352 h0.8
  text "limit" at 27.432,-149.86 h0.8
  text "output limitation" at 10.527,-165.1 h0.8
  text "Division" at 2.54,-165.354 h0.8
  text "voltage &" at 16.51,-166.878 h0.8
  text "1/10" at 1.016,-167.386 h0.8
  text "both open:" at 27.178,-167.386 h0.8
  text "current limit" at 16.51,-168.148 h0.8
  text "only" at 27.432,-168.91 h0.8
  text "current" at 27.432,-170.18 h0.8
  text "1/5" at 1.27,-170.942 h0.8
  text "limitation off" at 16.51,-170.942 h0.8
  text "limit" at 27.432,-171.45 h0.8
M1_BoardOutline:
  the board outline again, w0.254
M12_titleBlock:
  lines w0.127: -69.874,-186.677 -69.874,6.363 ; -69.874,-138.417 -64.794,-138.417 ; -69.874,-90.157 -64.794,-90.157 ; -69.874,-41.897 -64.794,-41.897 ; -64.794,-181.597 -64.794,1.283 ; 67.056,-151.13 103.632,-151.13 ; 67.286,-151.117 67.286,-181.597 102.846,-181.597 ; 76.176,-186.677 76.176,-181.597 ; 103.583,-173.977 217.146,-173.977 ; 103.583,-166.357 217.146,-166.357 ; 103.583,-158.737 140.946,-158.737 ; 140.946,-181.597 140.946,-166.357 140.946,-151.117 ; 149.201,-186.677 149.201,-181.597 ; 149.201,1.283 149.201,6.363 ; 194.286,-181.597 194.286,-166.357 ; 217.146,-138.417 222.226,-138.417 ; 217.146,-90.157 222.226,-90.157 ; 217.146,-41.897 222.226,-41.897 ; 217.146,1.283 217.146,-181.597 ; 222.226,-186.677 222.226,6.363 ; 140.946,-151.117 217.146,-151.117 217.146,-181.597 ; 140.946,-151.117 103.583,-151.117 103.583,-181.597 217.146,-181.597
  lines w0.254: 169.94,-150.495 169.94,-0.635 ; 169.94,-60.273 215.66,-60.273 215.66,-57.733 215.66,-38.735 ; 169.94,-38.735 215.66,-38.735 ; 169.94,-33.655 215.66,-33.655 215.66,-38.735
  text "1" at -33.628,2.934 h1.78
  text "3" at 112.168,2.934 h1.78
  text "4" at 185.066,2.934 h1.78
  text "A" at -67.969,-20.079 h1.78
  text "A" at 219.051,-20.079 h1.78
  text "Abstand von Frontpanelkante" at 172.48,-26.035 h1.52
  text "links unten zum Nullpunkt:" at 172.48,-28.575 h1.52
  text "13,9mm" at 172.48,-31.115 h1.52
  text "Mechanical Layer Definitionen:" at 172.48,-37.413 h1.52
  text "M1_boardOutline" at 172.48,-41.275 h1.52
  text "M11_text_topL" at 172.48,-45.033 h1.52
  text "M12_titleBlock" at 172.48,-47.573 h1.52
  text "M13_3D_topL" at 172.48,-50.113 h1.52
  text "M14_3D_botL" at 172.48,-52.653 h1.52
  text "M15_courtyard_topL" at 172.48,-54.909 h1.52
  text "M16_courtyard_botL" at 172.48,-57.449 h1.52
  text "B" at -67.969,-68.135 h1.78